# Altium PCB 12V Power.PcbDoc
Units mil, origin at the board's own origin, x right, y up, seen from the top; angles counter-clockwise.
Board outline 3000 x 3000 mil, 4 copper layers (Top Layer, Ground, Vin/Ground, Signal), stack 23.712 mil thick; 28 components, 18 nets, 92 pads, 94 vias.
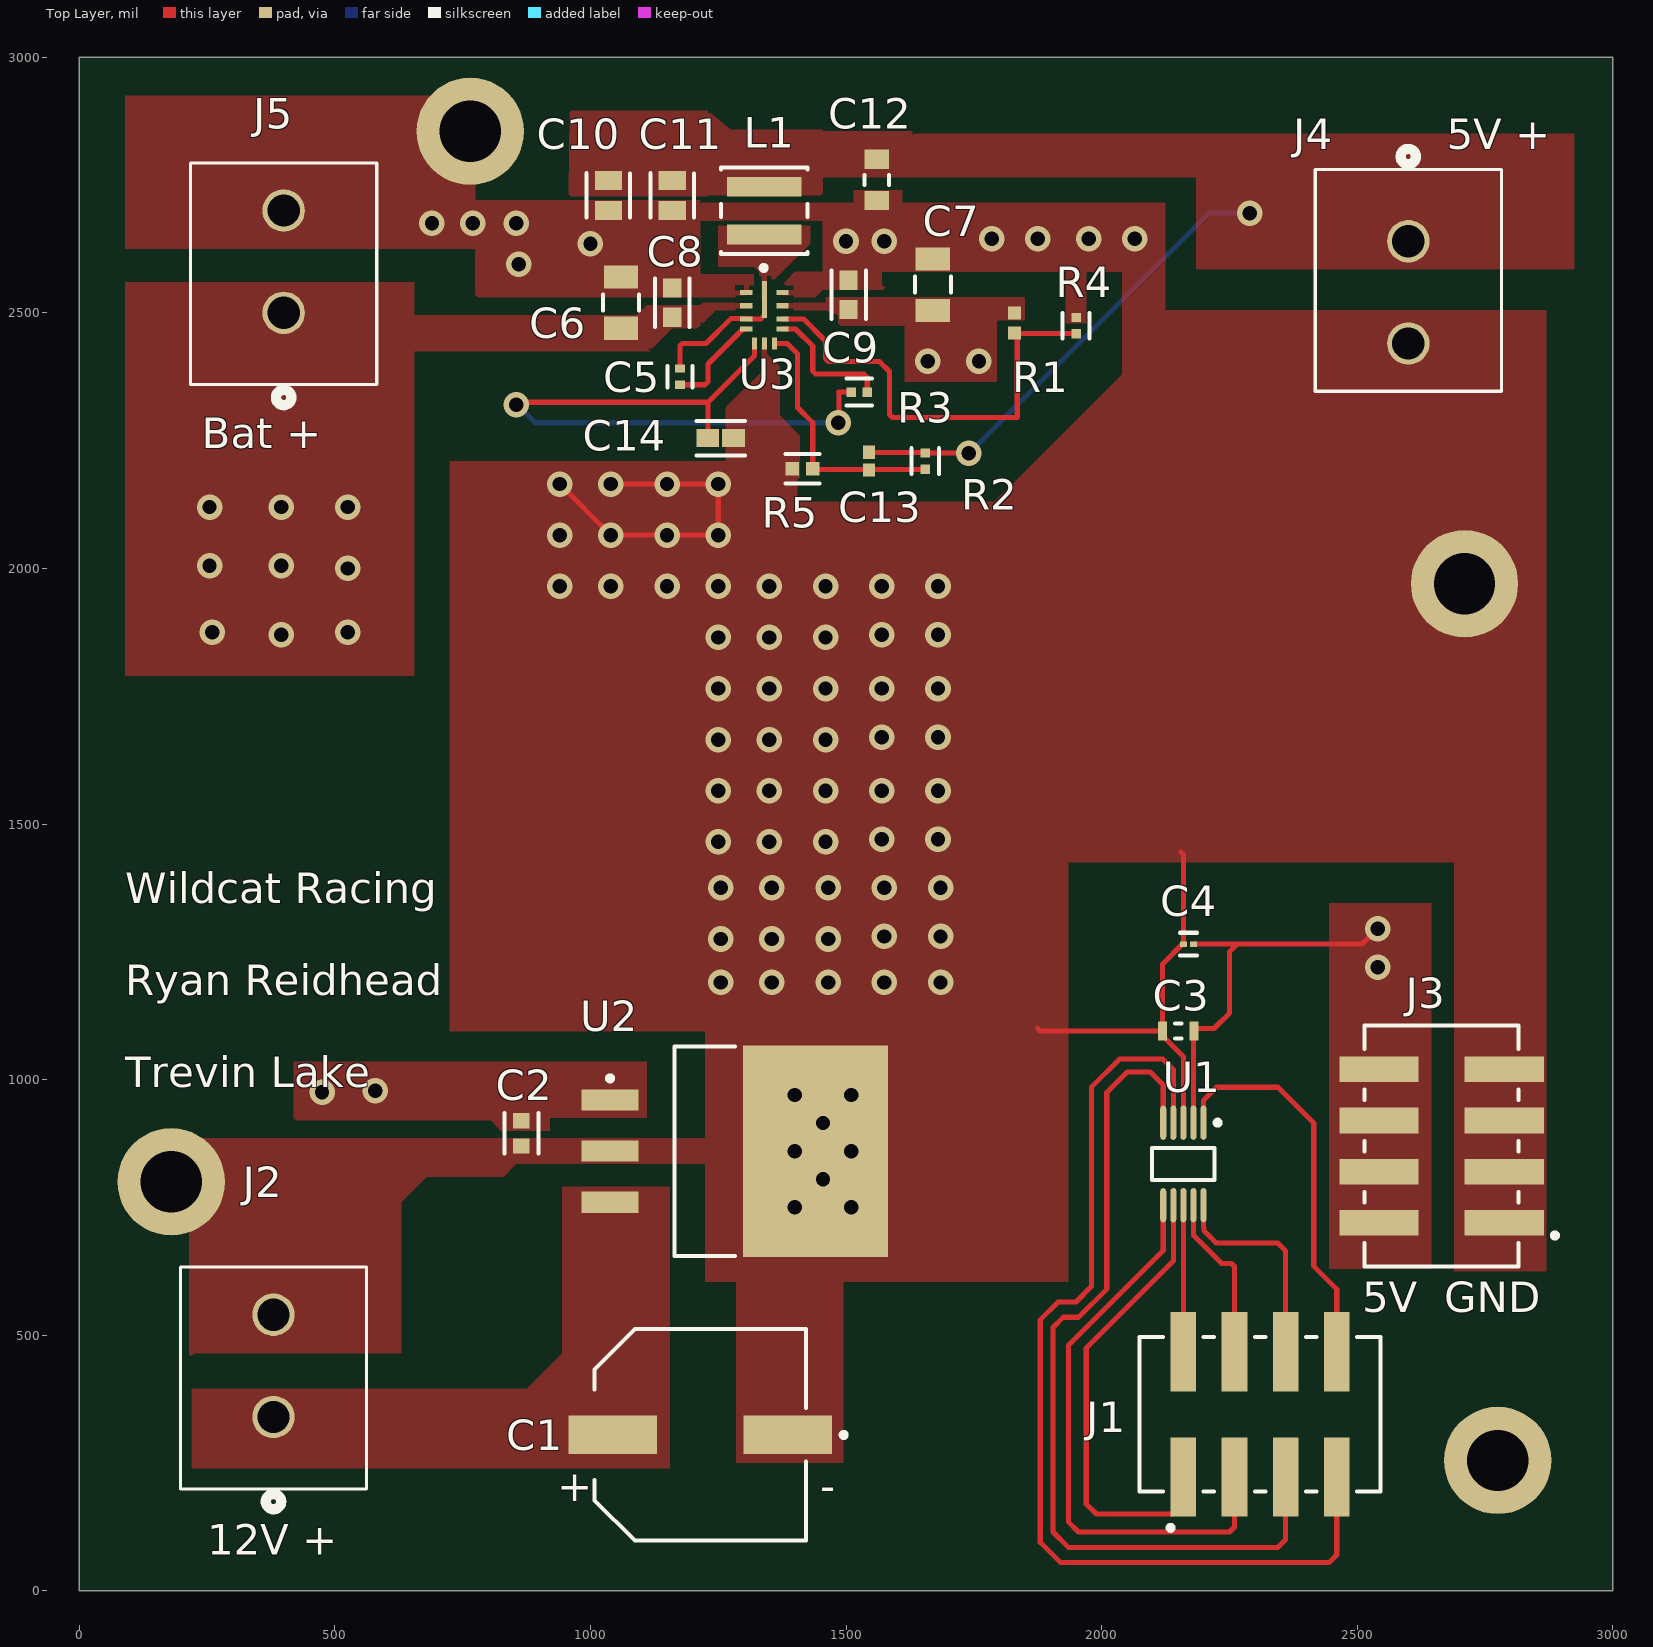
[diagram p0: Top Layer view]
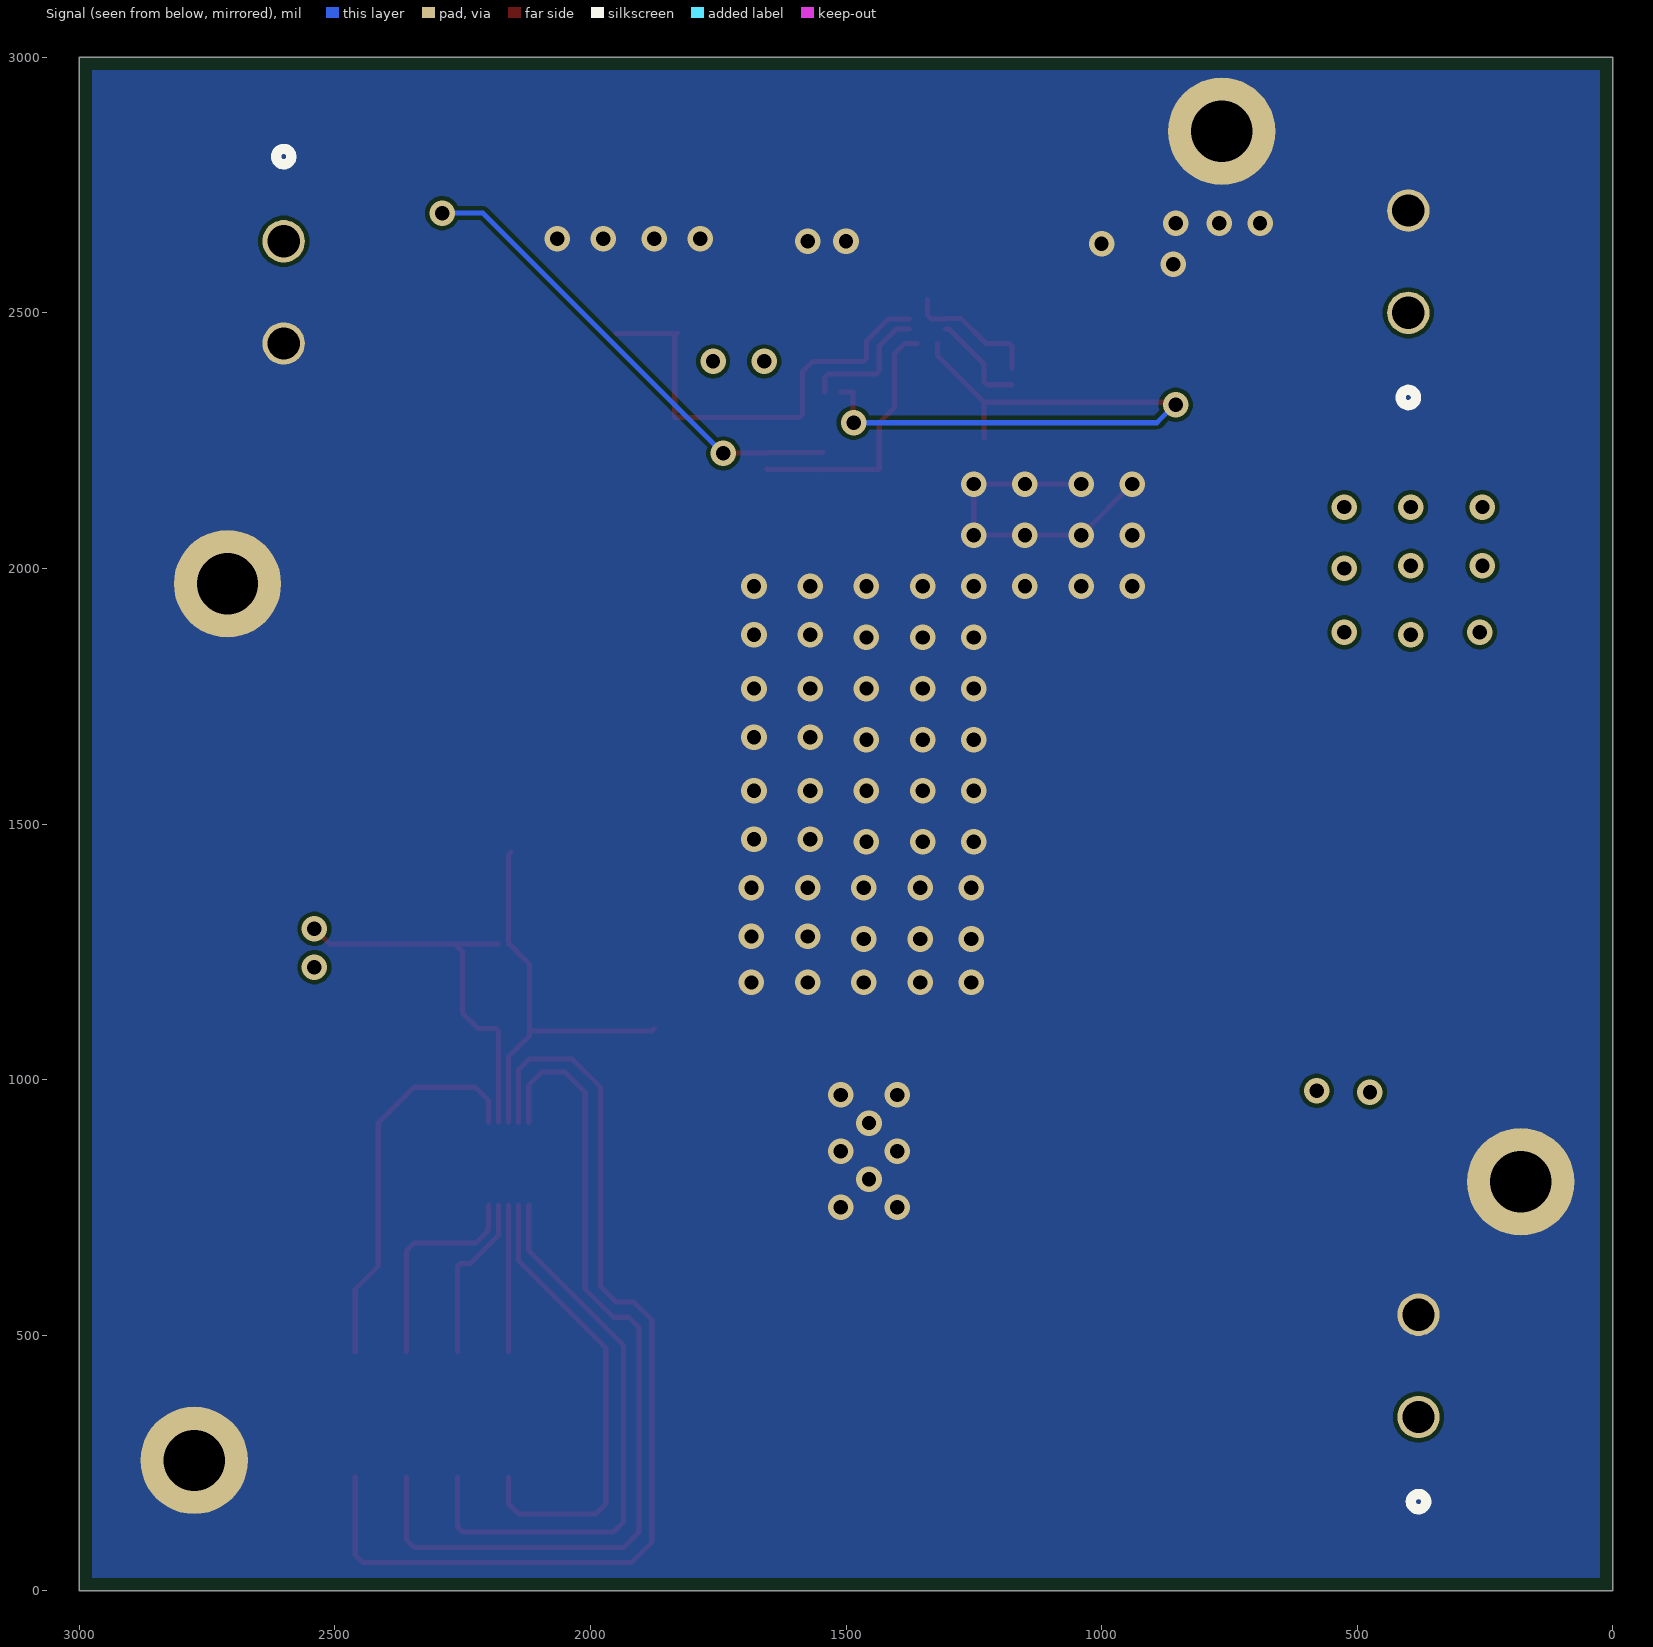
[diagram p1: Signal view, seen from below]
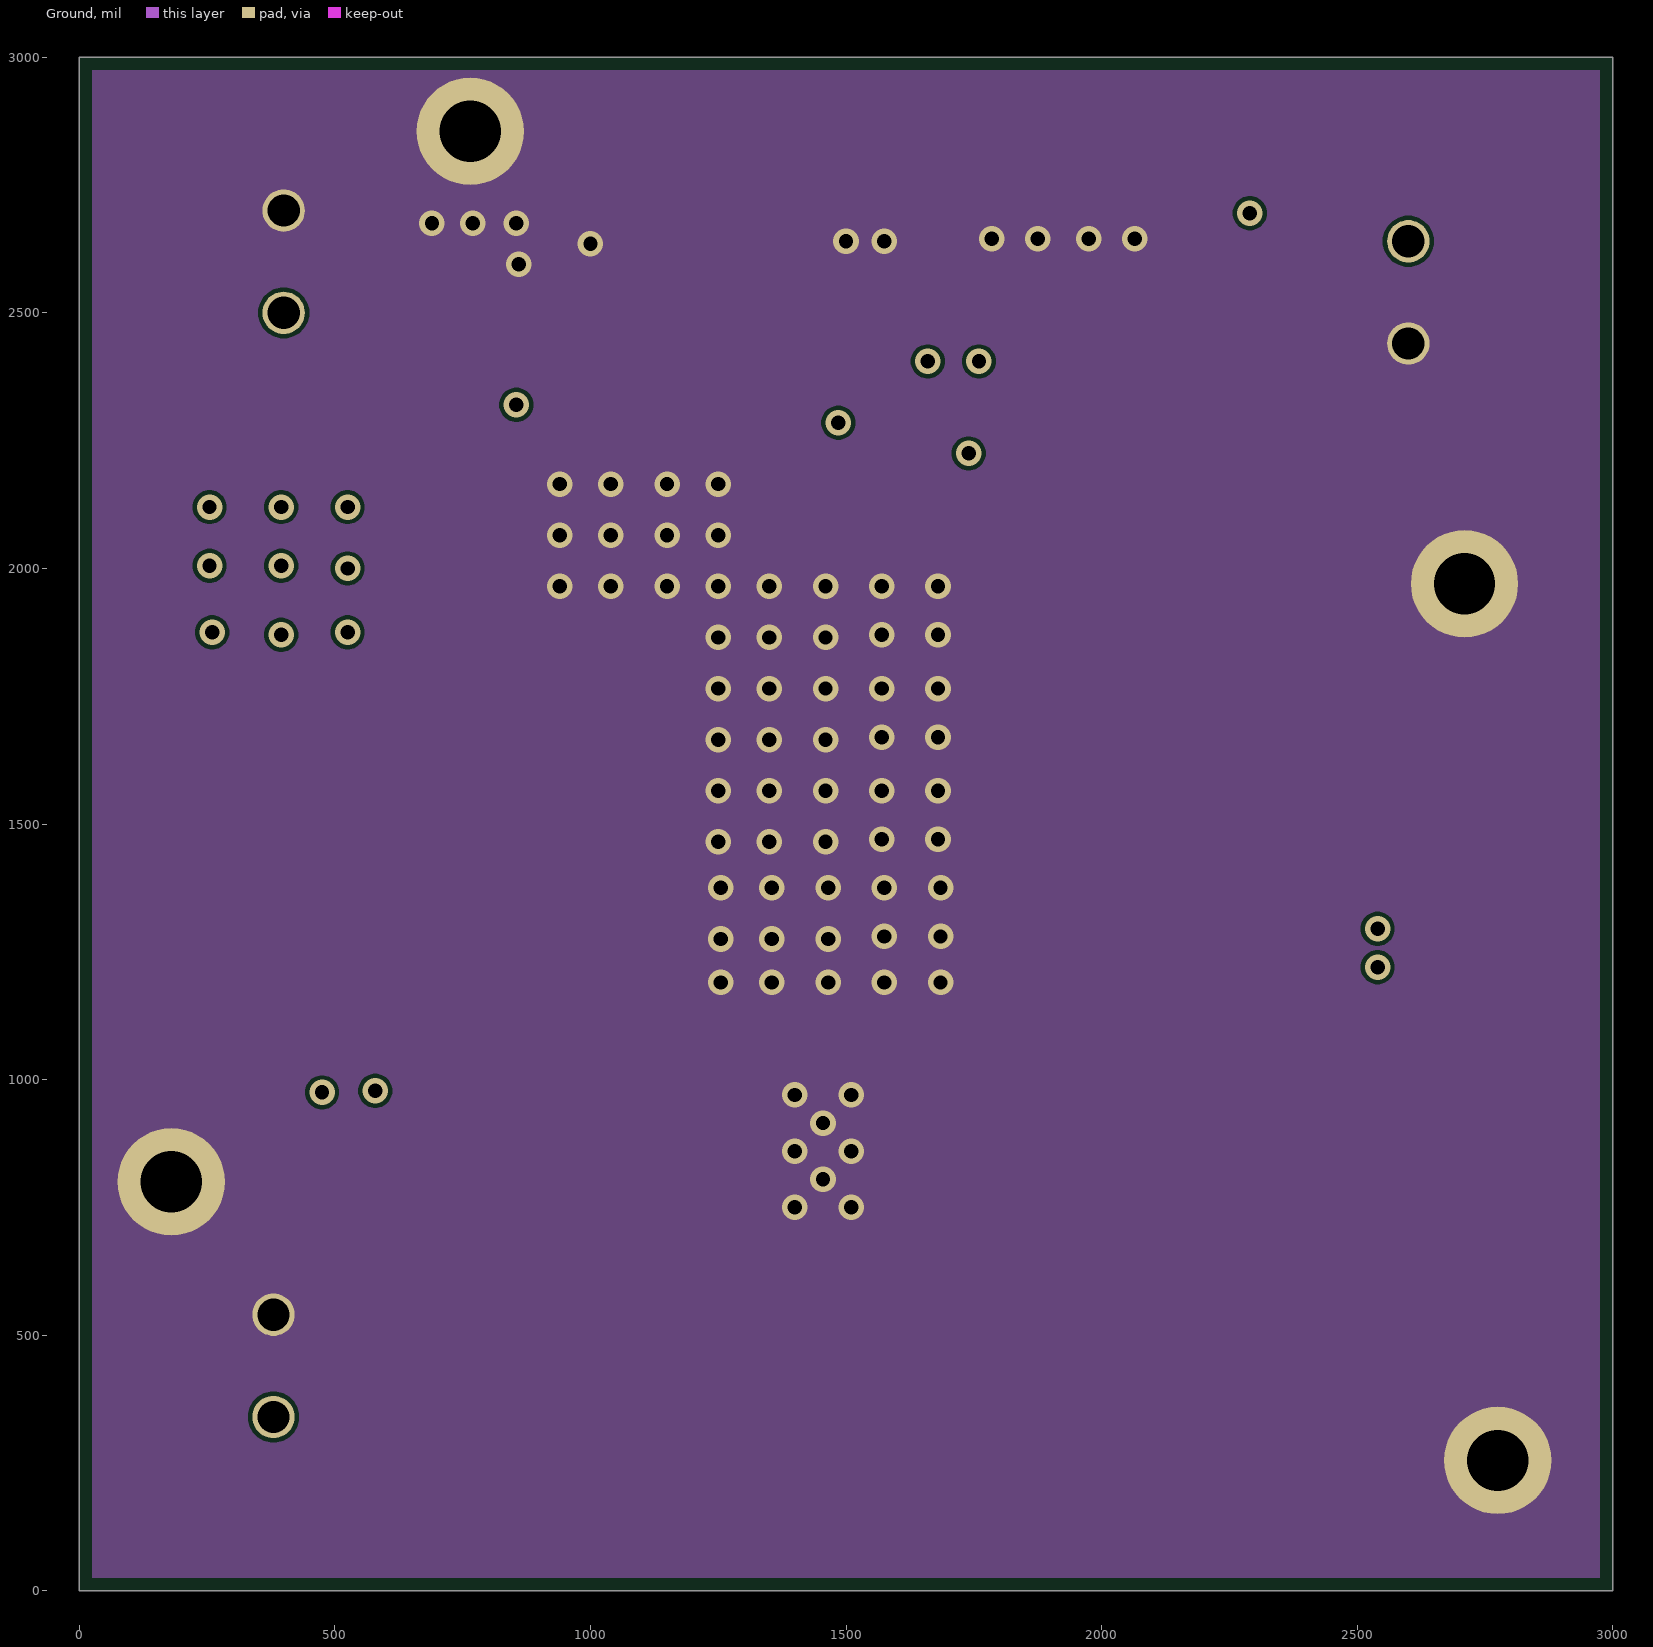
[diagram p2: Ground]
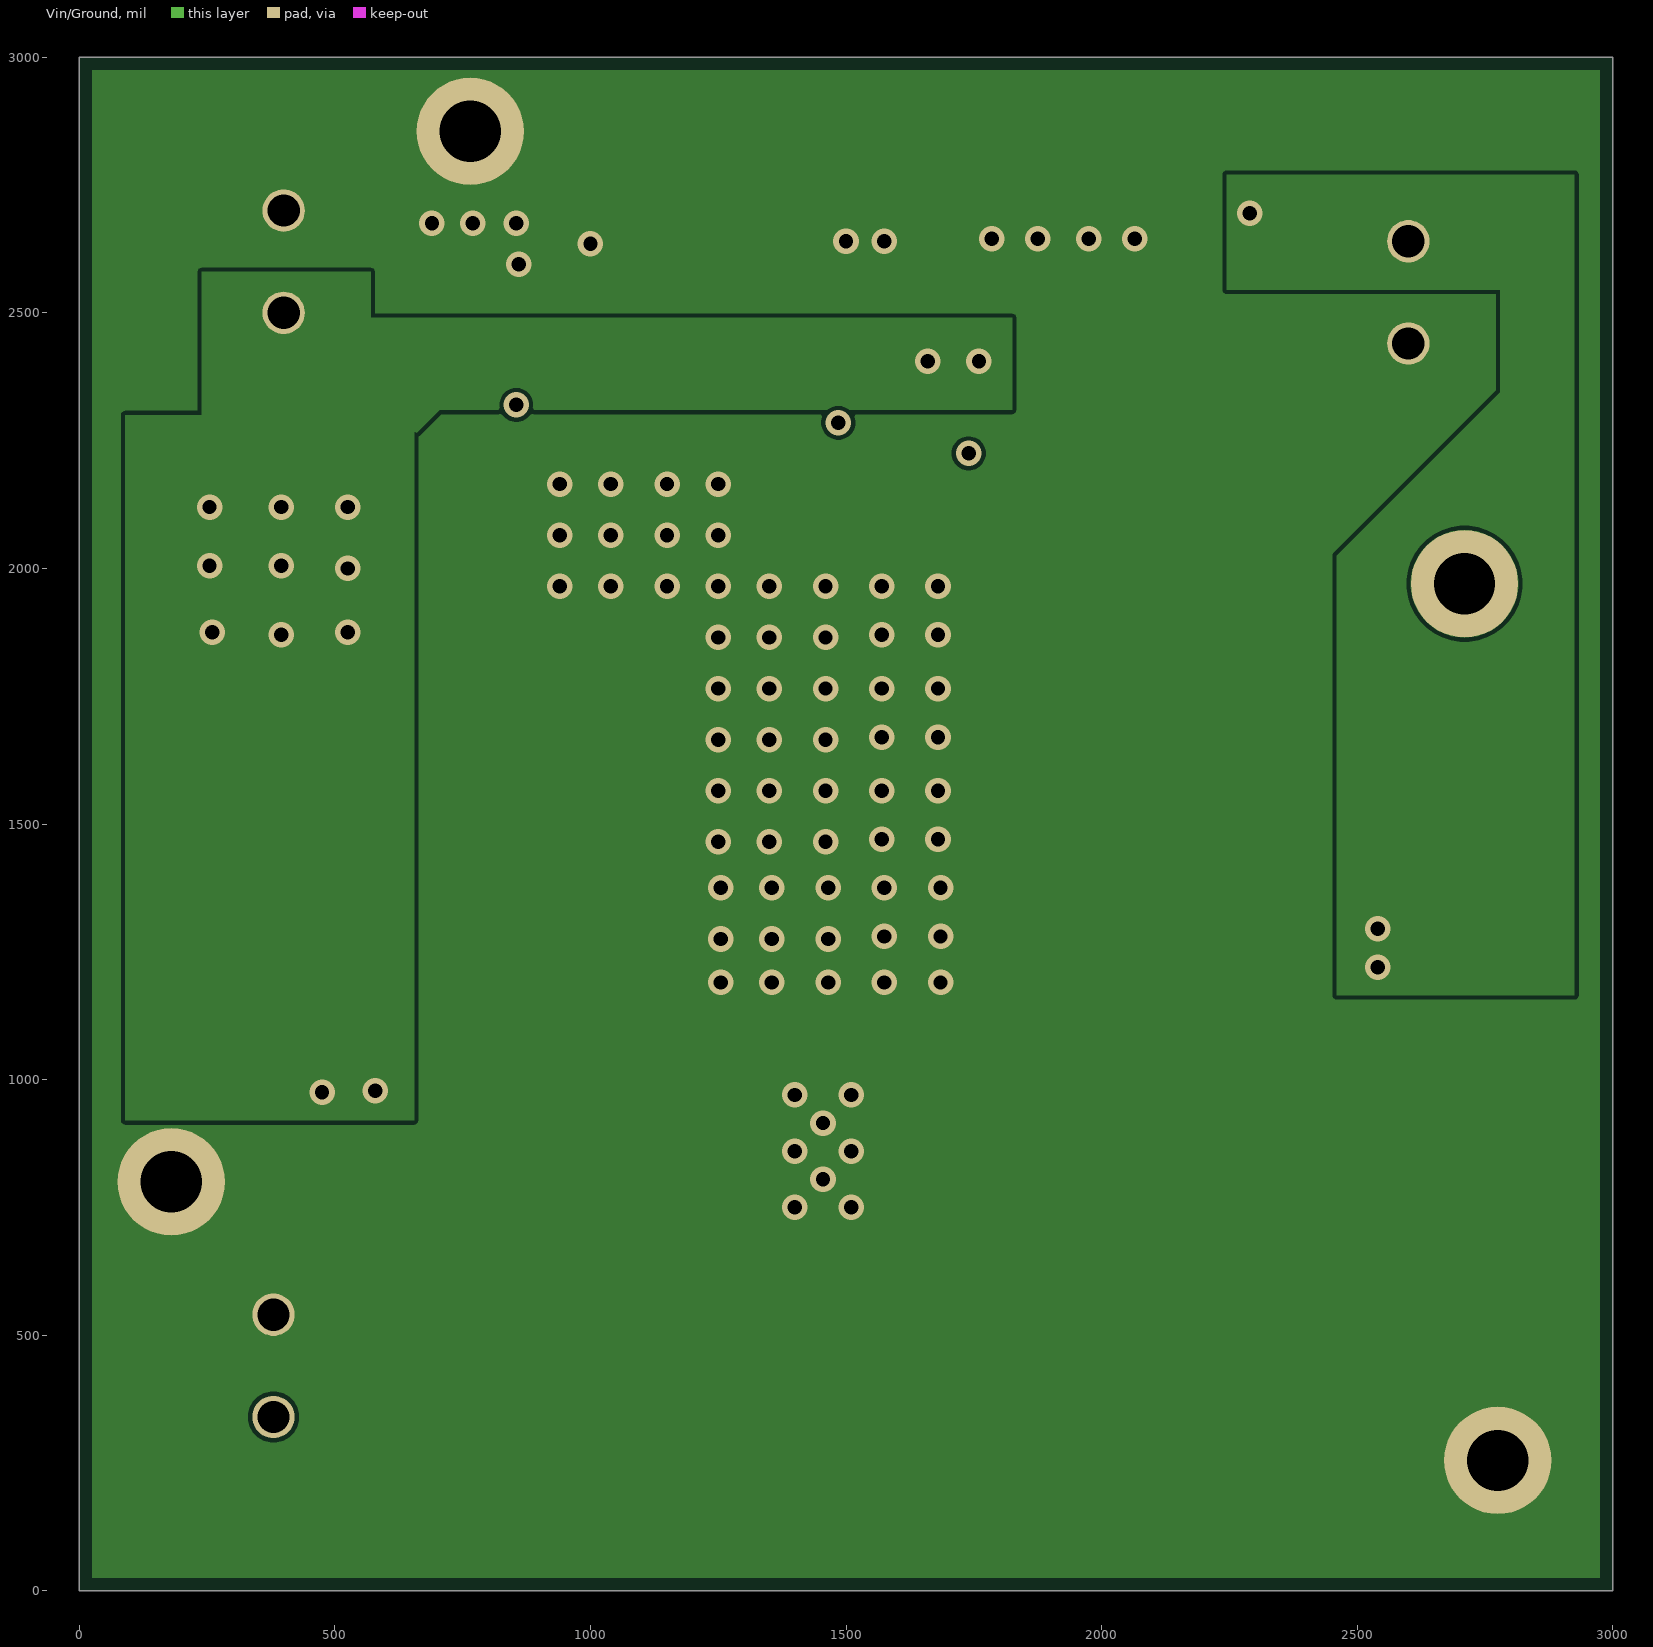
[diagram p3: Vin/Ground]
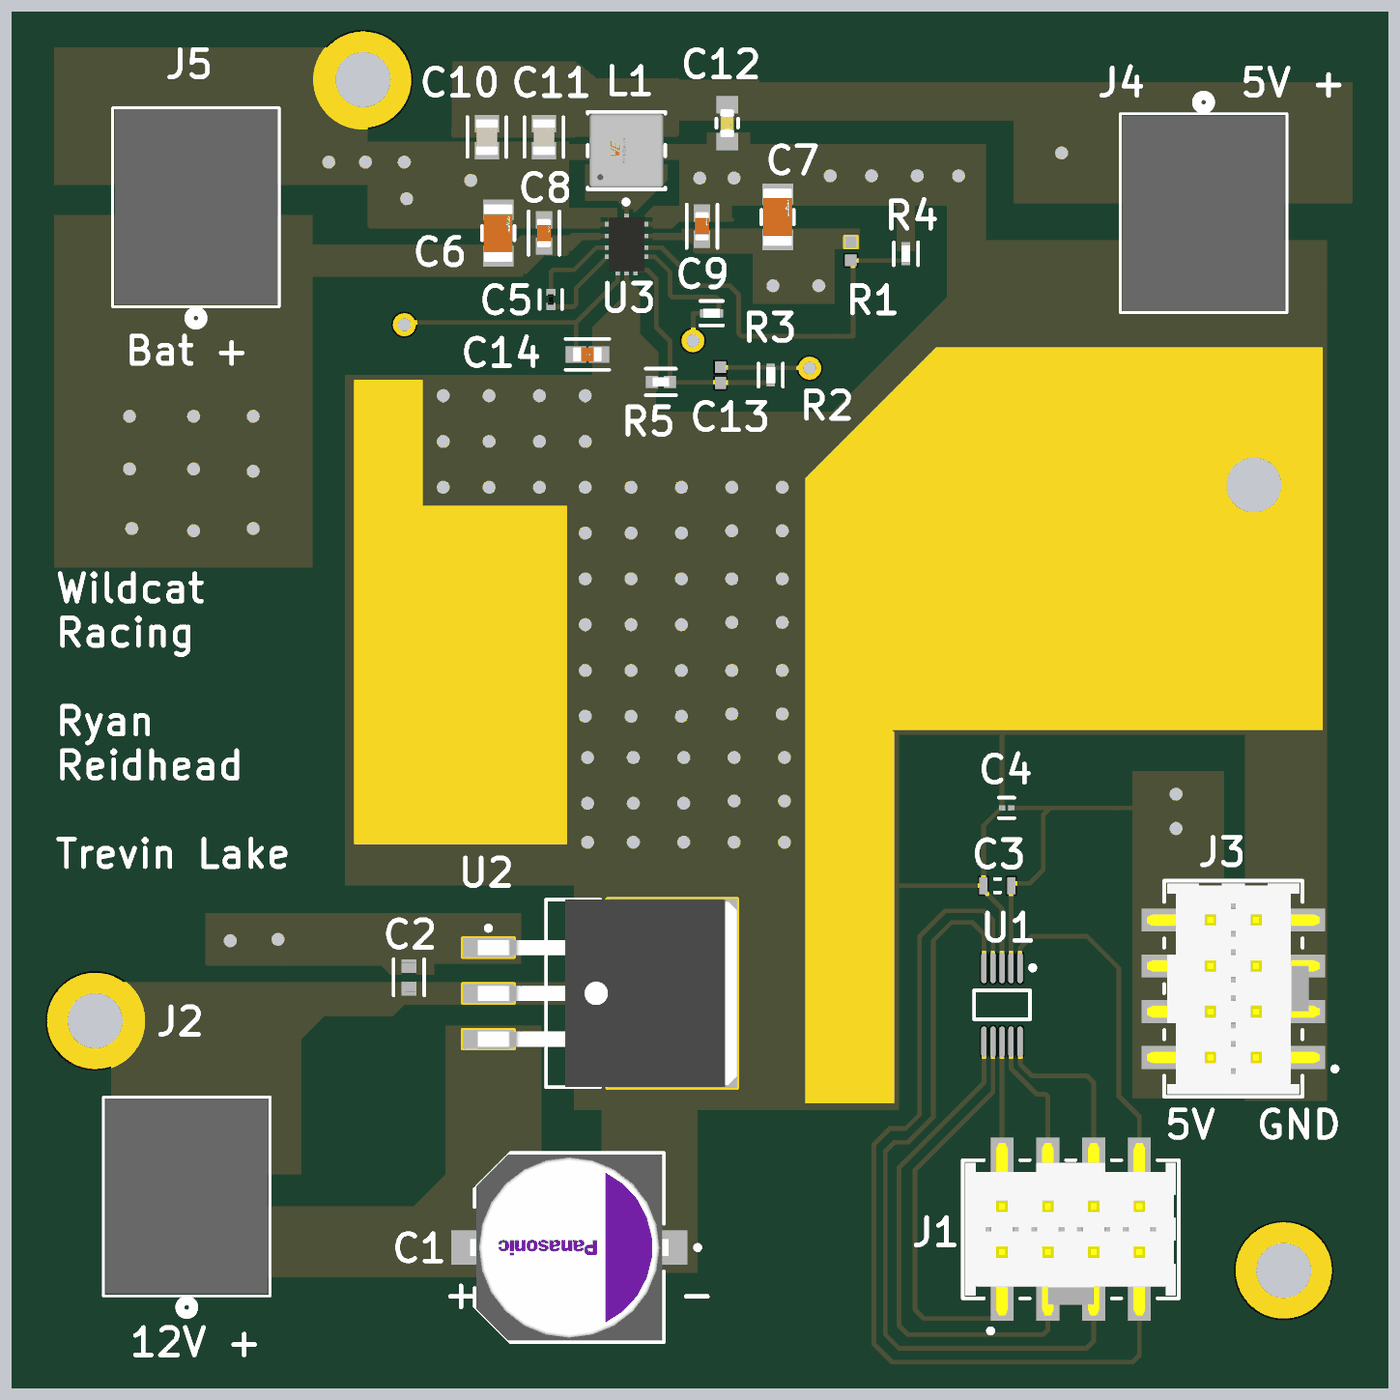
[diagram p4: 3D render of the assembled board from above, using the file's embedded part models]

## Layer stack, top to bottom
Top Solder: solder mask 0.4, Solder Resist, Dk 3.5
Top Layer: signal copper 1.378
Dielectric 2: prepreg 2.8, PP-006, Dk 4.1
Ground: signal copper 1.378
Dielectric 1: dielectric 12.6, FR-4, Dk 4.8
Vin/Ground: signal copper 1.378
Dielectric 3: prepreg 2.8, PP-006, Dk 4.1
Signal: signal copper 1.378
Bottom Solder: solder mask 0.4, Solder Resist, Dk 3.5

## Board outline
0,0 3000,0 3000,3000 0,3000

## Design rules (kind name [scope] priority, off if disabled: settings)
Clearance [All] p1: gap=8 ignorepadtopadclearanceinfootprint=FALSE
PolygonConnect [All] p1: connectstyle=Relief reliefconductorwidth=10 reliefentries=4 polygonreliefangle="90 Angle" airgapwidth=10
RoutingVias C14 [InNet('NetC14_2')] p1: holewidth=28 width=50 viastyle="Through Hole" minholewidth=28 minwidth=50 maxholewidth=28 maxwidth=50
RoutingVias [All] p2: holewidth=28 width=50 viastyle="Through Hole" minholewidth=28 minwidth=50 maxholewidth=28 maxwidth=50
SolderMaskExpansion [All] p1: expansion=4 istentingtop=FALSE
Width [All] p1: maxlimit=10 minlimit=10 preferedwidth=10
30 further rules are at their usual default settings.

## Components (designator, comment, footprint, x,y, rotation, side; value= is the part's Value field where it differs from the comment)
C1 "20SVP150M" FP-OS-CON-SMT-F12-MFG 1215,305 r180 top
C2 "CL10F474ZA8NNNC" FP-CL10-IPC_C 865,895 r270 top
C3 "TPCL105M010R5000" CAPC1609X100X15LL20 2150,1095 r180 top
C4 "CL03A104KP3NNNC" FP-CL03-IPC_C 2169.99,1265 r0 top
C5 "GRM155R71C104KA88D" FP-GRM15-MFG 1175,2375 r90 top value=0.10μF
C6 "GRM31CR71H475KA12L" FP-GRM31C-0_2-e0_3_0_8-IPC_C 1060,2520 r90 top
C7 "GRM31CR71H475KA12L" FP-GRM31C-0_2-e0_3_0_8-IPC_C 1670,2555 r90 top
C8 "GRM188R72A104KA35D" FP-GRM188-0_1-e0_2_0_5-IPC_B 1160,2520 r90 top
C9 "GRM188R72A104KA35D" FP-GRM188-0_1-e0_2_0_5-IPC_B 1505,2535 r90 top
C10 "C0805C106K8PACTU" FP-C0805C-DG-MFG 1035.29,2729.53 r270 top value=10uF
C11 "C0805C106K8PACTU" FP-C0805C-DG-MFG 1160,2729.53 r270 top value=10uF
C12 "CGA3E2X7R1H104K080AA" FP-CGA3E-0_3-0_1-IPC_A 1560,2760 r270 top
C13 "GRM1555C1H1R0CA01D" CAPC1005X55X25NL05T10 1545,2210 r90 top
C14 "C1608X5R1H105K080AB" FP-C1608-080-0_1-IPC_B 1254.78,2255 r180 top
J1 "IPL1-104-02-L-D-K" FP-IPL1-104-02-L-D-K-0 2310,345 r90 top
J2 "20020316-H021B01LF" CONN_20020316-H021B01LF_AMP 380,340 r90 top
J3 "IPL1-104-02-L-D-K" FP-IPL1-104-02-L-D-K-0 2665,870 r180 top
J4 "20020316-H021B01LF" CONN_20020316-H021B01LF_AMP 2600,2640 r270 top
J5 "20020316-H021B01LF" CONN_20020316-H021B01LF_AMP 400,2500 r90 top
L1 "78438357018" FP-78438357018-MFG 1340,2700 r90 top
R1 "CRCW04021M13FKED" RESC1005X40X25ML05T05 1830,2480.31 r90 top
R2 "CRCW0402100KFKED" FP-CRCW0402-e3-IPC_C 1655,2210 r90 top
R3 "CRCW0402100KFKED" FP-CRCW0402-e3-IPC_C 1525.83,2345 r180 top
R4 "CRCW0402100KFKED" FP-CRCW0402-e3-IPC_C 1950,2475 r270 top
R5 "CRCW04029K09FKED" FP-CRCW0402-e3-IPC_A 1415,2195 r180 top
U1 "ADC104S021CIMMX/NOPB" MUB10A_N 2160,835 r270 top
U2 "LM2940CS-12/NOPB" KTT0003B_N 1282.52,860 r0 top
U3 "LMR33630CQRNXRQ1" RNX0012B 1340.32,2495.12 r0 top

## Footprints (in the part's own frame and the unit in brackets; to place one, negate y for a bottom-side part, rotate by r counter-clockwise, add the part's x,y. Pads: shape width x height; smd on the part's side, far side on the other; paste and mask are expansions set on the pad)
CAPC1005X55X25NL05T10 [mm] "Chip Capacitor, 2-Leads, Body 1.00x0.50mm, IPC Medium Density"
  rect 0.66x0.62 smd: 1(-0.44,0) 2(0.44,0)
  body extent -0.53,-0.28 0.53,0.27, height 0.55
CAPC1609X100X15LL20 [mm] "Chip Capacitor, 2-Leads, Body 1.60x0.85mm, IPC High Density"
  rect 0.45x0.95 smd: 1(-0.775,0) 2(0.775,0)
  silkscreen extent -0.15,-0.38 0.15,0.38, body extent -0.9,-0.53 0.9,0.53, height 1
CONN_20020316-H021B01LF_AMP [mil]
  round 83 hole 63 mask+0: 1(0,0) 2(200,0)
  silkscreen extent -181,-182 293,182, body extent -136,-177 290,177, height 547
FP-78438357018-MFG [mm]
  rect 0.98x3.7 smd paste+0 mask+0: 1(-1.185,0) 2(1.185,0)
  silkscreen extent -2.97,-2.15 2.15,2.15, body extent -2.25,-2.25 2.25,2.25, height 0.25
FP-C0805C-DG-MFG [mm]
  rect 0.95x1.35 smd paste+0 mask+0: 1(-0.75,0) 2(0.75,0)
  silkscreen extent -1.11,-1.08 1.1,1.07, body extent -1.4,-0.85 1.4,0.85, height 0.25
FP-C1608-080-0_1-IPC_B [mil]
  rect 44.53x35.91 smd paste+0 mask+0: 1(-25.22,0) 2(25.22,0)
  silkscreen extent -47,-34 47,34, body extent -57,-28 57,28, height 10
FP-CGA3E-0_3-0_1-IPC_A [mm]
  rect 0.956x1.206 smd paste+0 mask+0: 1(-1.025,0) 2(1.025,0)
  silkscreen extent -0.25,-0.6 0.25,0.6, body extent -2,-1.1 2,1.1, height 0.25
FP-CL03-IPC_C [mil]
  rect 13.94x10.34 smd paste+0 mask+0: 1(-10.01,0) 2(10.01,0)
  silkscreen extent -17,-22 17,22, body extent -21,-10 21,10, height 10
FP-CL10-IPC_C [mil]
  rect 29.85x31.97 smd paste+0 mask+0: 1(-24.68,0) 2(24.68,0)
  silkscreen extent -40,-33 40,33, body extent -44,-22 44,22, height 10
FP-CRCW0402-e3-IPC_A [mil]
  rect 26.31x26.48 smd paste+0 mask+0: 1(-19.77,0) 2(19.77,0)
  silkscreen extent -33,-29 33,29, body extent -41,-21 41,21, height 10
FP-CRCW0402-e3-IPC_C [mil]
  rect 18.43x18.6 smd paste+0 mask+0: 1(-15.83,0) 2(15.83,0)
  silkscreen extent -25,-27 25,27, body extent -29,-15 29,15, height 10
FP-GRM15-MFG [mm]
  rect 0.4x0.5 smd paste+0 mask+0: 1(-0.4,0) 2(0.4,0)
  silkscreen extent -0.53,-0.63 0.53,0.63, body extent -0.7,-0.38 0.7,0.38, height 0.25
FP-GRM31C-0_2-e0_3_0_8-IPC_C [mil]
  rect 45.46x67.17 smd paste+0 mask+0: 1(-50.23,0) 2(50.23,0)
  silkscreen extent -16,-35 16,35, body extent -77,-39 77,39, height 10
FP-GRM188-0_1-e0_2_0_5-IPC_B [mil]
  rect 37.74x35.91 smd paste+0 mask+0: 1(-28.61,0) 2(28.61,0)
  silkscreen extent -47,-34 47,34, body extent -57,-28 57,28, height 10
FP-IPL1-104-02-L-D-K-0 [mm]
  rect 3.94x1.27 smd paste+0 mask+0: 1(-3.11,3.81) 2(-3.11,1.27) 3(-3.11,-1.27) 4(-3.11,-3.81) 5(3.11,3.81) 6(3.11,1.27) 7(3.11,-1.27) 8(3.11,-3.81)
  silkscreen extent -5.76,-5.99 3.84,5.99, body extent -5.18,-6.09 5.18,6.09, height 0.25
FP-OS-CON-SMT-F12-MFG [mm]
  rect 4.4x1.9 smd paste+0 mask+0: 1(-4.35,0) 2(4.35,0)
  silkscreen extent -7.25,-5.25 5.25,5.25, body extent -6.8,-5.5 6.8,5.5, height 0.25
KTT0003B_N [mm] "D2-PAK, 3-Leads, Body 10.41x8.89mm, Pitch 2.54mm, IPC Medium Density"
  rect 2.85x1.05 smd: 1(-6.2,2.54) 2(-6.2,0) 3(-6.2,-2.54)
  rect 7.2x10.5 smd: 4(4,0)
  silkscreen extent -6.32,-5.2 0,5.2, body extent -6.78,-5.2 7.57,5.2, height 4.64
MUB10A_N [mm] "TSSOP, 10-Leads, Body 3x3mm, Pitch 0.5mm, IPC Medium Density"
  oval 1.7x0.3 smd: 1(-2.05,1) 2(-2.05,0.5) 3(-2.05,0) 4(-2.05,-0.5) 5(-2.05,-1) 6(2.05,-1) 7(2.05,-0.5) 8(2.05,0) 9(2.05,0.5) 10(2.05,1)
  silkscreen extent -2.17,-1.55 0.8,1.83, body extent -1.55,-1.55 1.55,1.55, height 1.09
RESC1005X40X25ML05T05 [mm] "Chip Resistor, 2-Leads, Body 1.00x0.50mm, IPC Low Density"
  rect 0.65x0.65 smd: 1(-0.5,0) 2(0.5,0)
  body extent -0.53,-0.27 0.53,0.28, height 0.4
RNX0012B [mm]
  rect 0.6x0.25 smd paste+0 mask+0: 1(-0.9,1.125) 2(-0.9,0.475) 3(-0.9,-0.175) 4(-0.9,-0.675) 8(0.9,-0.675) 9(0.9,-0.175) 10(0.9,0.475) 11(0.9,1.125)
  rect 0.25x0.6 smd paste+0 mask+0: 5(-0.5,-1.4) 6(0,-1.4) 7(0.5,-1.4)
  rect 0.25x1.825 smd paste-0.9 mask+0: 12(0,0.788)
  body extent -1,-1.5 1,1.5, height 1

## Part data
C1: library part CMP-05428-000386-1, "Conductive Polymer Aluminum Solid Capacitors (OS-CON) 150uF ±20% 20V RADIAL SMT 10x12.6mm", Capacitance=150uF, Case/Package=Radial, ESR (Equivalent Series Resistance)=20mR, Leakage Current=600uA, Max Operating Temperature=105°C, Min Operating Temperature=-55°C, Package Quantity=400, Ripple Current=4.32A, Tolerance=20%, Voltage=20V, Construction=Cylindrical, Diameter=10mm, Dissipation Factor=15%, Height=12.6mm, Height - Seated (Max)=0.5inch, Lead Free="Lead Free", Length=12.6mm, Life (Hours)=2000Hour, Mount="Surface Mount", Number of Pins=12, Packaging="Tape and Reel", Polarity=Polar, Radiation Hardening=No, REACH SVHC="No SVHC", Ripple Current (AC)=4.32A, RoHS Compliant=Yes, Series="OS-CON™, SVP", Termination=SMD/SMT, Voltage Rating=20V, Voltage Rating (DC)=20V
C2: library part CMP-13271-004088-1, "Cap Ceramic 470nF 25V Y5V -20/+80% Pad SMD 0603 +85°C T/R", Capacitance=470nF, Case Code (Imperial)=0603, Case Code (Metric)=1608, Dielectric=Y5V, Max Operating Temperature=85°C, Min Operating Temperature=-30°C, Package Quantity=1, Tolerance=80%, Voltage Rating=25V, Case/Package=0603, Depth=0.8mm, Height=0.8mm, Lead Free="Lead Free", Length=1.6mm, Mount="Surface Mount", Packaging="Tape and Reel", Radiation Hardening=No, Thickness=0.035inch, Voltage Rating (DC)=25V, Width=0.031inch
C3: library part CMP-2006-00208-1, Manufacturer="AVX Interconnect / Elco", Part Number=TPCL105M010R5000
C4: library part CMP-2010-00672-2, "Cap Ceramic 100nF 10V X5R ±10% Pad SMD 0201 +85°C T/R", Capacitance=100nF, Case Code (Imperial)=0201, Case Code (Metric)=0603, Dielectric=X5R, Max Operating Temperature=85°C, Min Operating Temperature=-55°C, Package Quantity=1, Tolerance=10%, Voltage Rating=10V, Case/Package=0201, Contact Plating=Tin, Depth=0.3mm, Height=0.3mm, Lead Free="Lead Free", Length=0.6mm, Mount="Surface Mount", Packaging="Tape and Reel", Radiation Hardening=No, Thickness=0.013inch, Voltage Rating (DC)=10V, Width=0.012inch
C5: library part CMP-2100-03641-2, "CAP CER 0.1UF 16V X7R 0402", Capacitance=0.10μF, Manufacturer=Murata, Package=GRM15, Temperature="-55°C to +125°C", Temperature Characteristic=X7R, Temperature Range High=+125°C, Temperature Range Low=-55°C, Tolerance=10%, Voltage Rating=16Vdc, Category=Cap, ComponentLink2Description=Datasheet, ComponentLink2URL=https://search.murata.co.jp/Ceramy/image/img/A01X/G101/ENG/GRM155R71H471KA01-01A.pdf, Device Class L1="Passive Components", Device Class L2=Capacitors, Device Class L3="Ceramic Capacitors", Digikey Description="CAP CER 0.1UF 16V X7R 0402", Height=0.55mm, Ipc Land Pattern Name=CAPC10050X219, Lead Free=yes, Manufacturer Part Number=GRM155R71C104KA88D, Material=Ceramic, Mouser Description="0402 0.1 uF 16V ±10 % Tolerance X7R SMT Multilayer Ceramic Capacitor", Octopart=https://octopart.com/grm155r71c104ka88d-murata-196880, RoHS=TRUE, Standoff Height=0mm
C6 C7: library part CMP-1037-04923-3, "Chip Multilayer Ceramic Capacitors for General Purpose, 1206, 4.7uF, X7R, 15%, 10%, 50V", Capacitance=4.7uF, Case Code (Imperial)=1206, Case Code (Metric)=3216, Dielectric=X7R, Max Operating Temperature=125°C, Min Operating Temperature=-55°C, Package Quantity=2000, Tolerance=10%, Voltage=50V, Case/Package=1206, Depth=1.6mm, Height=1.6mm, Lead Free="Lead Free", Length=3.2mm, Material=Ceramic, Mount="Surface Mount", Packaging="Tape and Reel", Radiation Hardening=No, REACH SVHC="No SVHC", Termination=SMD/SMT, Thickness=0.071inch, Voltage Rating=50V, Voltage Rating (DC)=50V, Width=0.063inch
C8 C9: library part CMP-1035-02595-8, "Chip Multilayer Ceramic Capacitors for General Purpose, 0603, 0.10uF, X7R, 15%, 10%, 100V", Capacitance=100nF, Case Code (Imperial)=0603, Case Code (Metric)=1608, Dielectric=X7R, Max Operating Temperature=125°C, Min Operating Temperature=-55°C, Package Quantity=1, Tolerance=10%, Voltage=100V, Case/Package=0603, Depth=0.8mm, Height=0.8mm, Lead Free="Lead Free", Length=1.6mm, Material=Ceramic, Mount="Surface Mount", Packaging="Tape and Reel", Radiation Hardening=No, REACH SVHC="No SVHC", Termination=SMD/SMT, Thickness=0.035inch, Voltage Rating=100V, Voltage Rating (DC)=100V, Weight=0.000222oz, Width=0.8mm
C10 C11: library part CMP-2007-03243-2, "CAP CER 10UF 10V X5R 0805", 3DS Part Number=220-00001, Capacitance=10uF, Manufacturer=Kemet, Package=C0805C-DG, Temperature="-55°C to +85°C", Temperature Characteristic=X5R, Temperature Coefficient=15%, Temperature Range High=+85°C, Temperature Range Low=-55°C, Tolerance=10%, Voltage=10V, Automotive=No, Category=Cap, ComponentLink2Description=Datasheet, ComponentLink2URL=https://content.kemet.com/datasheets/KEM_C1006_X5R_SMD.pdf, Device Class L1="Passive Components", Device Class L2=Capacitors, Device Class L3="Ceramic Capacitors", Digikey Description="CAP CER 10UF 10V X5R 0805", Height=1.4mm, Ipc Land Pattern Name=CAPC200125X125, Lead Free=Yes, Manufacturer Part Number=C0805C106K8PACTU, Material=Ceramic, Mouser Description="CAP CER 10UF 10V X5R 0805", Octopart=https://octopart.com/c0805c106k8pactu-kemet-98697, RoHS=TRUE, Voltage Rating=10V
C12: library part CMP-2000-07546-2, "Cap Ceramic 100nF 50V X7R 10% Pad SMD 0603 +125°C Automotive T/R", Capacitance=100nF, Case Code (Imperial)=0603, Case Code (Metric)=1608, Dielectric=X7R, Max Operating Temperature=125°C, Min Operating Temperature=-55°C, Package Quantity=1, Ratings=AEC-Q200, Tolerance=10%, Voltage=50V, Case/Package=0603, Composition=Ceramic, Depth=0.8mm, Height=0.8mm, Lead Free="Lead Free", Length=1.6mm, Mount="Surface Mount", Packaging="Tape and Reel", Radiation Hardening=No, REACH SVHC="No SVHC", Termination=SMD/SMT, Thickness=0.035inch, Voltage Rating=50V, Voltage Rating (DC)=50V, Weight=7.1E-05oz, Width=0.8mm
C13: library part CMP-2008-04277-1, Manufacturer=Murata, Part Number=GRM1555C1H1R0CA01D
C14: library part CMP-2000-06025-2, "Multilayer Ceramic Capacitors 1μF ±10% 50V X5R SMD 0603", Capacitance=1uF, Case Code (Imperial)=0603, Case Code (Metric)=1608, Dielectric=X5R, Dielectric Material=Ceramic, Max Operating Temperature=85°C, Min Operating Temperature=-55°C, Package Quantity=1, Tolerance=10%, Voltage=50V, Case/Package=0603, Construction=Flat, Depth=0.8mm, Height=0.8mm, Lead Free="Lead Free", Length=1.6mm, Mount="Surface Mount", Number of Pins=2, Packaging="Tape and Reel", Radiation Hardening=No, REACH SVHC="No SVHC", Resistor Type=Ceramic, RoHS Compliant=Yes, Series=C, Termination=SMD/SMT, Thickness=0.035inch, Voltage Rating=50V, Voltage Rating (DC)=50V, Weight=7.1E-05oz, Width=0.031inch
J1 J3: library part CMP-02766-000804-1, "4 Position 2 Row .100\" (2.54 mm) pitch connector", Max Current Rating=7.4A, Max Operating Temperature=125°C, Max Voltage Rating (AC)=675V, Min Operating Temperature=-55°C, Contact Material=Bronze, Contact Plating=Gold, Depth=9.58mm, Gender=Male, Housing Material=Polymer, Length=11.68mm, Mount="Surface Mount", Number of Contacts=8, Number of Ports=1, Number of Terminals/Pins=8, Orientation=Straight, Packaging=Rail/Tube, Pitch=2.54mm, Radiation Hardening=No, Termination=Solder
J2 J4 J5: "No Description Available", Mfr_Name="Amphenol ICC", Copyright="Copyright (C) 2022 Ultra Librarian. All rights reserved.", Manufacturer_Part_Number=20020316-H021B01LF, RefDes=RefDes, Type=DEV
L1: library part CMP-207846-000027-1, "FIXED IND 1.8UH 5.8A 21MOHM SMD", Case/Package=Nonstandard, Current Rating=5.8A, DC Resistance (DCR)=21mR, Inductance=1.8uH, Max Operating Temperature=125°C, Min Operating Temperature=-40°C, Ratings=AEC-Q200, Resistor Type=Wirewound, Saturation Current=8A, Self Resonant Frequency=42MHz, Test Frequency=100kHz, Tolerance=20%, Core Material=Ferrite, Mount="Surface Mount", Packaging="Tape and Reel", RoHS Compliant=Yes, Shielding=Shielded
R1: library part CMP-1011-00854-2, Manufacturer="Vishay Dale", Part Number=CRCW04021M13FKED
R2 R3 R4: library part CMP-2002-08123-3, "RES Thick Film, 100kΩ, 1%, 0.063W, 100ppm/°C, 0402", Case Code (Imperial)=0402, Case Code (Metric)=1005, Max Operating Temperature=155°C, Max Power Dissipation=63mW, Min Operating Temperature=-55°C, Package Quantity=10000, Resistance=100kR, Temperature Coefficient=100ppm/°C, Tolerance=1%, Voltage Rating=50V, Case/Package=0402, Composition="Thick Film", Contact Plating=Tin, Depth=0.5mm, Features="Automotive AEC-Q200", Height=0.35mm, Lead Free="Lead Free", Length=1mm, Military Standard=Not, Mount="Surface Mount", Number of Pins=2, Number of Terminations=2, Packaging="Tape and Reel", Power Rating=63mW, Radiation Hardening=No, Termination=SMD/SMT, Voltage Rating (DC)=50V, Weight=2.3E-05oz, Width=0.02inch
R5: library part CMP-2002-00285-2, "RES Thick Film, 9.09kΩ, 1%, 0.063W, 100ppm/°C, 0402", Case Code (Imperial)=0402, Case Code (Metric)=1005, Max Operating Temperature=155°C, Max Power Dissipation=63mW, Min Operating Temperature=-55°C, Package Quantity=10, Resistance=9.09kR, Temperature Coefficient=100ppm/°C, Tolerance=1%, Voltage Rating=50V, Case/Package=0402, Composition="Thick Film", Contact Plating=Tin, Depth=0.5mm, Features="Automotive AEC-Q200", Height=0.35mm, Lead Free="Lead Free", Length=1mm, Military Standard=Not, Mount="Surface Mount", Number of Pins=2, Number of Terminations=2, Packaging="Tape and Reel", Power Rating=63mW, Radiation Hardening=No, Termination=SMD/SMT, Voltage Rating (DC)=50V, Weight=2.3E-05oz, Width=0.02inch
U1: library part CMP-0054-00490-2, "4 Channel, 50 kSPS to 200 kSPS, 10-Bit A/D Converter, 10-pin Mini SOIC, Pb-Free", Manufacturer="National Semiconductor", PackageTopMarking=ZXTT*X20C, PowerWise=Y, Code_JEDEC=MO-187-BA, ComponentLink1Description="ADC104S021 Datasheet", ComponentLink1URL=http://www.national.com/ds/AD/ADC104S021.pdf, ComponentLink2Description="ADC104S021 Web Page", ComponentLink2URL=http://www.national.com/pf/AD/ADC104S021.html, ComponentLink3Description="MUB10A Package Page", ComponentLink3URL=http://www.national.com/packaging/folders/mub10a.html, CompType="ADC IC", DatasheetVersion=Feb-2010, PackageDescription="Mini-SO, Molded, .118 x .118 x .034in Body, 10 Lead, .0197in Pitch", PackageReference=MUB10A, PackageVersion="revB, Jul-2003", PinCount=10, RevisionNote="Component URLs added", RoHS=Y
U2: library part CMP-0062-00534-4, "1A Low Dropout Regulator, 3-pin TO-263, Pb-Free", Manufacturer="Texas Instruments", PackageTopMarking="NSUZXYTTE#*LM2940CS*-12 P+", PowerWise=N, Code_JEDEC=MO-169-AA, ComponentLink1Description="Datasheet URL", ComponentLink1URL=http://www.ti.com/general/docs/lit/getliterature.tsp?genericPartNumber=LM2940C&fileType=pdf, CompType="LDO IC", PackageDescription="TO-263, Molded, .400 x .390 x .180in, 3 Lead, .1in Pitch, Surface Mount", PackageReference=KTT0003B, PinCount=3, RoHS=Y
U3: library part LMR33630CQRNXRQ1_1, "No Description Available", Mfr_Name="Texas Instruments", Copyright="Copyright (C) 2022 Ultra Librarian. All rights reserved.", Manufacturer_Part_Number=LMR33630CQRNXRQ1, RefDes=RefDes, Type=DEV

## Free pads (board coordinates)
  round 210 hole 120: 2(180,800) 2(765,2855) 2(2710,1970) 2(2775,255)

## Via types
v1: diameter 50, hole 28, Top Layer to Signal, tented both sides, 83 vias
v2: diameter 50, hole 28, Top Layer to Signal, tented bottom, 8 vias
v3: diameter 50, hole 28, Top Layer to Signal, 3 vias

## Nets (pads, with @x,y where several pads share a name; then routed paths per layer and width w, separated by ;. In a path a pad name is that pad's centre, name@x,y a point inside that pad or via, vN(x,y) a via of type N, cw(c..) or ccw(c..) an arc to the next point about the centre after c; other vN are vias at no path point)
5V+: C3.1 C4.2 C10.1 C11.1 C12.1 C13.2 J3.5 J3.6 J3.7 J3.8 J4.1 L1.2 R2.2 U1.2 | length 1718.6
  Top Layer w10: C13.2 1545.75,2226.58 1654.25,2226.58 R2.2 1739.17,2225.83 v3(1740,2225) ; U1.2 2180.03,916.06 2180.03,1094.52 C3.1 2180.51,1096.14 2184.37,1100 2220,1100 2250,1130 2250,1250 2265,1265 ; C4.2 2265,1265 ; v1(2540,1295) 2510,1265 2265,1265
  Signal w10: v3(1740,2225) 2210,2695 v1(2290,2695)
  other v1: 2540,1220
GND: C1.1 C2.2 C3.2 C4.1 C6.2 C7.2 C8.2 C9.2 C10.2 C11.2 C12.2 C14.1 J2.2 J3.1 J3.2 J3.3 J3.4 J4.2 J5.2 pad.2 R4.1 R5.2 U1.3 U2.2 U2.4 U3.1 U3.6 U3.11 | length 1473.9
  Top Layer w10: v1(940,2165) v1(1040,2065) v1(1250,2065) v1(1250,2165) v1(1150,2165) v1(1040,2165) ; 1875,1100 1880,1095 C3.2 ; 2155,1445 2159.98,1440.02 C4.1 2158.18,1265 2119.49,1226.31 C3.2 ; U1.3 2160,1044.65 2119.49,1085.16 C3.2
  other v1: 1255,1190 1355,1190 1465,1190 1575,1190 1685,1190 1255,1275 1355,1275 1465,1275 1575,1280 1685,1280 1255,1375 1355,1375 1465,1375 1575,1375 1685,1375 1250,1465 1350,1465 1460,1465 1570,1470 1680,1470 1250,1565 1350,1565 1460,1565 1570,1565 1680,1565 1250,1665 1350,1665 1460,1665 1570,1670 1680,1670 1250,1765 1350,1765 1460,1765 1570,1765 1680,1765 1250,1865 1350,1865 1460,1865 1570,1870 1680,1870 940,1965 1040,1965 1150,1965 1250,1965 1350,1965 1460,1965 1570,1965 1680,1965 940,2065 1150,2065 860,2595 1000,2635 1500,2640 1575,2640 1785,2645 1875,2645 1975,2645 2065,2645 690,2675 770,2675 855,2675
  other v2: 1400,750 1510,750 1455,805 1400,860 1510,860 1455,915 1400,970 1510,970
NetC1_2: C1.2 J2.1 U2.3
NetC5_1: C5.1 U3.4 | length 195.6
  Top Layer w10: C5.1 1224.14,2359.25 1230,2365.11 1230,2400 1298.54,2468.54 U3.4
NetC5_2: C5.2 L1.1 U3.3 U3.12 | length 265.5
  Top Layer w10: C5.2 1175,2435 1180,2440 1226.22,2440 1274.76,2488.54 U3.3@1304.88,2488.54 ; U3.3 1333.25,2488.23 1340.32,2495.3 U3.12
NetC13_1: C13.1 R2.1 R5.1 U3.7 | length 512.6
  Top Layer w10: U3.7 1385,2440 1405,2420 1405,2315 1435,2285 1435,2195.23 R5.1 1435.93,2193.84 1543.84,2193.84 C13.1 1545.75,2193.42 1654.25,2193.42 R2.1
NetC14_2: C14.2 R3.2 U3.5 | length 1342.9
  Top Layer w10: v3(855,2320) 860,2325 1230,2325 ; C14.2 1230,2255.43 1230,2325 ; U3.5 1320.63,2415.63 1230,2325 ; v3@1485.97,2282.62 1485.97,2344.03 1485,2345 R3.2
  Vin/Ground w10: v3@1474.18,2285 v3(1485,2285)
  Signal w10: v3(855,2320) 856.88,2320 891.88,2285 v3(1485,2285)
NetJ1_1: J1.1 U1.7 | length 914
  Top Layer w10: U1.7 2140.32,645.32 1970,475 1970,170 1990,150 2140,150 2160,170 J1.1
NetJ1_2: J1.2 U1.6 | length 1131.2
  Top Layer w10: U1.6 2120.63,665.63 1935,480 1935,135 1955,115 2250,115 2260,125 J1.2
NetJ1_3: J1.3 U1.5 | length 1728.7
  Top Layer w10: U1.5 2120.63,989.37 2095,1015 2050,1015 2010,975 2010,590 1955,535 1925,535 1905,515 1905,115 1935,85 2345,85 2360,100 J1.3
NetJ1_4: J1.4 U1.4 | length 2002.8
  Top Layer w10: U1.4 2140.32,1019.68 2120,1040 2035,1040 1980,985 1980,595 1950,565 1915,565 1880,530 1880,95 1920,55 2445,55 2460,70 J1.4
NetJ1_5: J1.5 U1.8 | length 286.9
  Top Layer w10: J1.5 U1.8
NetJ1_6: J1.6 U1.9 | length 331.3
  Top Layer w10: U1.9 2179.69,695.31 2235,640 2254.14,640 2260,634.14 J1.6
NetJ1_7: J1.7 U1.10 | length 423.7
  Top Layer w10: U1.10 2199.72,753.94 2199.72,710.28 2200,710 2200,705 2225,680 2345,680 2360,665 J1.7
NetJ1_8: J1.8 U1.1 | length 765.1
  Top Layer w10: U1.1 2199.37,959.37 2225,985 2345,985 2415,915 2415,635 2460,590 J1.8
NetR1_1: R1.1 R4.2 U3.9 | length 895.9
  Top Layer w10: U3.9 1416.77,2488.23 1460,2445 1460,2410.86 1465.86,2405 1565,2405 1585,2385 1585,2300.86 1590.86,2295 1835,2295 1835,2455.63 R1.1@1830.73,2459.9 ; R1.1 R1.1@1830.73,2459.9 ; R4.2 1949.27,2459.9 R1.1@1830.73,2459.9
NetR3_1: R3.1 U3.8 | length 262.5
  Top Layer w10: U3.8 1401.46,2468.54 1435,2435 1435,2385.86 1440.86,2380 1535,2380 1541.67,2373.33 R3.1
Vin: C2.1 C6.1 C7.1 C8.1 C9.1 J5.1 R1.2 U2.1 U3.2 U3.10
  other v1: 475,975 579.14,977.97 395,1870 260,1875 525,1875 525,2000 255,2005 395,2005 255,2120 395,2120 525,2120 1660,2405 1760,2405

## Polygon pours and split planes (outlines as drawn)
GND on Top Layer "GND_L01_P061" (solid, pour order 61): 2870,1425 2870,625 2690,625 2690,1425
GND on Top Layer "GND_L01_P044" (solid, pour order 44): 1265,2210 725,2210 725,1095 1225,1095 1225,605 1935,605 1935,1425 2870,1425 2870,2505 2040,2505 2040,2380 1860,2200 1790,2130 1410,2130 1405,2135 1405,2205 1270,2205
5V+ on Top Layer "5V+_L01_P056" (solid, pour order 56): 2645,1345 2645,630 2445,630 2445,1345
NetC1_2 on Top Layer "NETC1_2_L01_P053" (solid, pour order 53): 220,240 1155,240 1155,790 945,790 945,465 875,395 220,395
NetC5_2 on Top Layer "NETC5_2_L01_P052" (solid, pour order 52): 1250,2670 1430,2670 1430,2635 1360,2565 1355,2565 1355,2555 1350,2550 1330,2550 1330,2580 1320,2590 1250,2590
GND on Top Layer "GND_L01_P051" (solid, pour order 51): 1285,605 1285,250 1495,250 1495,605
GND on Top Layer "GND_L01_P050" (solid, pour order 50): 1225,885 215,885 215,455 225,465 630,465 630,760 680,810 830,810 855,835 1225,835
Vin on Top Layer "VIN_L01_P049" (solid, pour order 49): 418.45,921.62 420,923.16 420,1035 1110,1035 1110,925 920,925 920,900 825,900 805,920 425,920 420,925
GND on Top Layer "GND_L01_P043" (solid, pour order 43): 1410.49,2171.63 1407.12,2175 1265,2175 1265,2315 1335,2385 1335,2450 1345,2450 1345,2420 1370,2395 1370,2300 1410,2260 1410,2175
GND on Top Layer "GND_L01_P042" (solid, pour order 42): 1365,2530 1440,2530 1455,2545 1455,2580 1400,2580 1365,2545
Vin on Top Layer "VIN_L01_P041" (solid, pour order 41): 1460,2505 1365,2505 1365,2520 1459.95,2520 1459.97,2520.02 1460,2519.98
Vin on Top Layer "VIN_L01_P040" (solid, pour order 40): 1532.96,2477.52 1460,2505 1460,2530 1532.96,2530
Vin on Top Layer "VIN_L01_P039" (solid, pour order 39): 1670,2530 1485,2530 1485,2480 1490,2475 1670,2475
Vin on Top Layer "VIN_L01_P038" (solid, pour order 38): 1790,2485 1850,2485 1850,2530 1790,2530
Vin on Top Layer "VIN_L01_P037" (solid, pour order 37): 1615,2365 1795,2365 1795,2530 1615,2530
Vin on Top Layer "VIN_L01_P036" (solid, pour order 36): 1215,2515 1220,2520 1320,2520 1320,2505 1245,2505 1215,2475
Vin on Top Layer "VIN_L01_P035" (solid, pour order 35): 1159.95,2469.48 1209.48,2469.48 1215,2475 1215,2515 1160,2515
Vin on Top Layer "VIN_L01_P034" (solid, pour order 34): 1115,2425 1160,2470 1160,2515 1110,2515 1085,2490 1115,2460
Vin on Top Layer "VIN_L01_P024" (solid, pour order 24): 650,2495 1115,2495 1115,2425 650,2425
Vin on Top Layer "VIN_L01_P023" (solid, pour order 23): 90,2560 655,2560 655,1790 90,1790
GND on Top Layer "GND_L01_P021" (solid, pour order 21): 2040,2505 2040,2580 2125,2580 2125,2505
GND on Top Layer "GND_L01_P020" (solid, pour order 20): 2660,2505 2040,2505 2040,2380 2660,2380
GND on Top Layer "GND_L01_P019" (solid, pour order 19): 1930,2580 2125,2580 2125,2715 1935,2715 1930,2710
GND on Top Layer "GND_L01_P018" (solid, pour order 18): 1930,2580 1930,2480 1970,2480 1970,2580
GND on Top Layer "GND_L01_P017" (solid, pour order 17): 1770,2580 1930,2580 1935,2585 1935,2715 1770,2715
GND on Top Layer "GND_L01_P016" (solid, pour order 16): 1515,2715 1515,2740 1610,2740 1610,2717.5 1612.5,2715
GND on Top Layer "GND_L01_P015" (solid, pour order 15): 1455,2715 1770,2715 1770,2580 1570,2580 1470,2680 1455,2680
GND on Top Layer "GND_L01_P014" (solid, pour order 14): 1455,2680 1455,2545 1580,2545 1570,2555 1570,2680
GND on Top Layer "GND_L01_P013" (solid, pour order 13): 1215,2718.09 1218.09,2715 1455,2715 1455,2680 1215,2680
GND on Top Layer "GND_L01_P012" (solid, pour order 12): 1215,2530 1320,2530 1320,2575 1215,2575
GND on Top Layer "GND_L01_P011" (solid, pour order 11): 980,2530 1215,2530 1215,2660 980,2660
GND on Top Layer "GND_L01_P010" (solid, pour order 10): 980,2720 1215,2720 1215,2660 980,2660
GND on Top Layer "GND_L01_P009" (solid, pour order 9): 980,2720 775,2720 775,2535 780,2530 980,2530
GND on Top Layer "GND_L01_P008" (solid, pour order 8): 90,2625 775,2625 775,2925 90,2925
5V+ on Top Layer "5V+_L01_P006" (solid, pour order 6): 2185,2585 2930,2585 2925,2590 2925,2850 2185,2850
5V+ on Top Layer "5V+_L01_P005" (solid, pour order 5): 1630,2765 2185,2765 2185,2850 1635,2850 1630,2855
5V+ on Top Layer "5V+_L01_P004" (solid, pour order 4): 1455,2765 1630,2765 1630,2855 1455,2855
5V+ on Top Layer "5V+_L01_P003" (solid, pour order 3): 1230,2730 1450,2730 1455,2734.12 1455,2857.66 1274.94,2857.66 1229.59,2895
5V+ on Top Layer "5V+_L01_P001" (solid, pour order 1): 957.55,2728.28 1228.28,2728.28 1230,2730 1230,2895 965,2895 960,2900
GND on Vin/Ground "GND_L03_P059" (solid, pour order 59): 25,2975 25,25 2975,25 2975,2975
5V+ on Vin/Ground "5V+_L03_P055" (solid, pour order 55): 2460,1165 2925,1165 2925,2770 2780,2770 2780,2345 2460,2025
5V+ on Vin/Ground "5V+_L03_P054" (solid, pour order 54): 2245,2770 2780,2770 2780,2545 2245,2545
Vin on Vin/Ground "VIN_L03_P048" (solid, pour order 48): 87.88,1791.72 90,1789.61 90,920 655,920 655,1790 90,1790
Vin on Vin/Ground "VIN_L03_P047" (solid, pour order 47): 240,2295 240,2580 570,2580 570,2295
Vin on Vin/Ground "VIN_L03_P046" (solid, pour order 46): 372.47,2300 372.47,2490 1825,2490 1825,2310 705,2310 655,2260 654.93,2260.07 654.93,2300
Vin on Vin/Ground "VIN_L03_P045" (solid, pour order 45): 656.29,2301.36 654.93,2300 90,2300 90,1790 655,1790 655,2300
GND on Top Solder (solid): 1210,1185 745,1185 745,2200 895,2200 895,1925 1210,1925
GND on Top Solder (solid): 1730,1985 1730,620 1925,620 1925,1430 1920,1435 2860,1435 2860,2270 2015,2270
GND on Bottom Solder (solid): 965,2370 640,2370 640,2545 965,2545
GND on Bottom Solder (solid): 2305,2955 2305,2785 2190,2785 2100,2695 2100,2690 1745,2690 1745,2460 1605,2460 1615,2470 1615,2690 1450,2690 1450,2370 965,2370 965,2545 1075,2655 1075,2725 1070,2720 740,2720 740,2955
GND on Bottom Solder (solid): 1335,975 1190,1120 1190,1820 1080,1930 890,1930 890,2200 595,2200 595,1820 575,1790 40,1790 40,1035 670,1035 670,975
GND on Bottom Solder (solid): 585,705 585,890 670,975 1335,975 1335,705 590,705
GND on Bottom Solder (solid): 1570,705 590,705 585,705 585,40 1570,40 1570,700
GND on Bottom Solder (solid): 2960,2320 1990,2320 1740,2070 1740,1145 1735,1145 1570,980 1570,40 2960,40
GND on Ground "GND_L02_P057" (solid, pour order 57): 25,25 2975,25 2975,2975 25,2975
GND on Signal "GND_L04_P060" (solid, pour order 60): 25,2975 25,25 2975,25 2975,2975

## Silkscreen, mask and mechanical layers (free items; w line width, h text height)
Top Overlay:
  text "5V +" at 2675,2820 h60
  text "Bat +" at 240,2235 h60
  text "Wildcat Racing /  / Ryan Reidhead /  / Trevin Lake" at 90,985 h60
  text "5V  GND" at 2510,545 h60
  text "+" at 935,175 h60
  text "-" at 1450,175.01 h60
  text "12V +" at 250,70 h60
Board:
  the board outline again, w8